# Altium PCB QFN-48_L6.0-W6.0-P0.40-TL-EP4.2_2026-06-13.pcbdoc
Units mm, origin at the board's own origin, x right, y up, seen from the top; angles counter-clockwise.
Board outline 36.64 x 32.85 mm, 2 copper layers (Top Layer, Bottom Layer); 1 components, 0 nets, 49 pads, 0 vias.
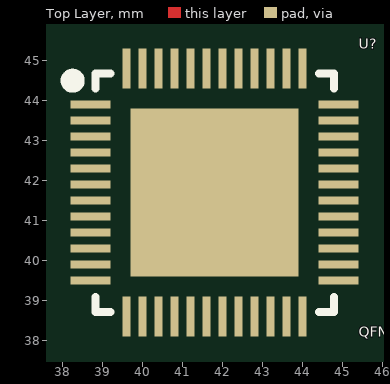
[diagram p0: Top Layer view]
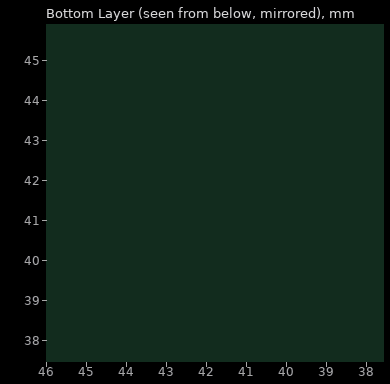
[diagram p1: Bottom Layer view, seen from below]

## Layer stack, top to bottom
Top Layer: signal copper (thickness not stored)
Dielectric: dielectric 0.32, FR-4, Dk 4.8
Bottom Layer: signal copper (thickness not stored)

## Board outline
62.037,25.4 25.4,25.4 25.4,58.254 62.037,58.254

## Components (designator, comment, footprint, x,y, rotation, side; value= is the part's Value field where it differs from the comment)
U? "QFN-48_L6.0-W6.0-P0.40-TL-EP4.2" QFN-48_L6.0-W6.0-P0.40-TL-EP4.2 41.75,41.7 r0 top

## Footprints (in the part's own frame and the unit in brackets; to place one, negate y for a bottom-side part, rotate by r counter-clockwise, add the part's x,y. Pads: shape width x height; smd on the part's side, far side on the other; paste and mask are expansions set on the pad)
QFN-48_L6.0-W6.0-P0.40-TL-EP4.2 [mm]
  rect 1x0.2 smd paste-100 mask+0.05: 1(-3.05,2.2) 2(-3.05,1.8) 3(-3.05,1.4) 4(-3.05,1) 5(-3.05,0.6) 6(-3.05,0.2) 7(-3.05,-0.2) 8(-3.05,-0.6) 9(-3.05,-1) 10(-3.05,-1.4) 11(-3.05,-1.8) 12(-3.05,-2.2) 25(3.15,-2.2) 26(3.15,-1.8) 27(3.15,-1.4) 28(3.15,-1) 29(3.15,-0.6) 30(3.15,-0.2) 31(3.15,0.2) 32(3.15,0.6) 33(3.15,1) 34(3.15,1.4) 35(3.15,1.8) 36(3.15,2.2)
  rect 0.2x1 smd paste-100 mask+0.05: 13(-2.15,-3.1) 14(-1.75,-3.1) 15(-1.35,-3.1) 16(-0.95,-3.1) 17(-0.55,-3.1) 18(-0.15,-3.1) 19(0.25,-3.1) 20(0.65,-3.1) 21(1.05,-3.1) 22(1.45,-3.1) 23(1.85,-3.1) 24(2.25,-3.1) 37(2.25,3.1) 38(1.85,3.1) 39(1.45,3.1) 40(1.05,3.1) 41(0.65,3.1) 42(0.25,3.1) 43(-0.15,3.1) 44(-0.55,3.1) 45(-0.95,3.1) 46(-1.35,3.1) 47(-1.75,3.1) 48(-2.15,3.1)
  rect 4.2x4.2 smd paste-100 mask+0.05: 49(0.05,0)
  silkscreen extent -3.65,-2.98 3.03,2.98

## Nets (pads, with @x,y where several pads share a name; then routed paths per layer and width w, separated by ;. In a path a pad name is that pad's centre, name@x,y a point inside that pad or via, vN(x,y) a via of type N, cw(c..) or ccw(c..) an arc to the next point about the centre after c; other vN are vias at no path point)
pads on no net: U?.1 U?.2 U?.3 U?.4 U?.5 U?.6 U?.7 U?.8 U?.9 U?.10 U?.11 U?.12 U?.13 U?.14 U?.15 U?.16 U?.17 U?.18 U?.19 U?.20 U?.21 U?.22 U?.23 U?.24 U?.25 U?.26 U?.27 U?.28 U?.29 U?.30 U?.31 U?.32 U?.33 U?.34 U?.35 U?.36 U?.37 U?.38 U?.39 U?.40 U?.41 U?.42 U?.43 U?.44 U?.45 U?.46 U?.47 U?.48 U?.49